# Altium PCB REO_ECG.PcbDoc (part 1 of 2)
Units mm, origin at the board's own origin, x right, y up, seen from the top; angles counter-clockwise.
Board outline 105 x 125 mm, 2 copper layers (Top Layer, Bottom Layer); 206 components, 124 nets, 654 pads, 46 vias.
Unrouted connection lines stored in the file: 133.
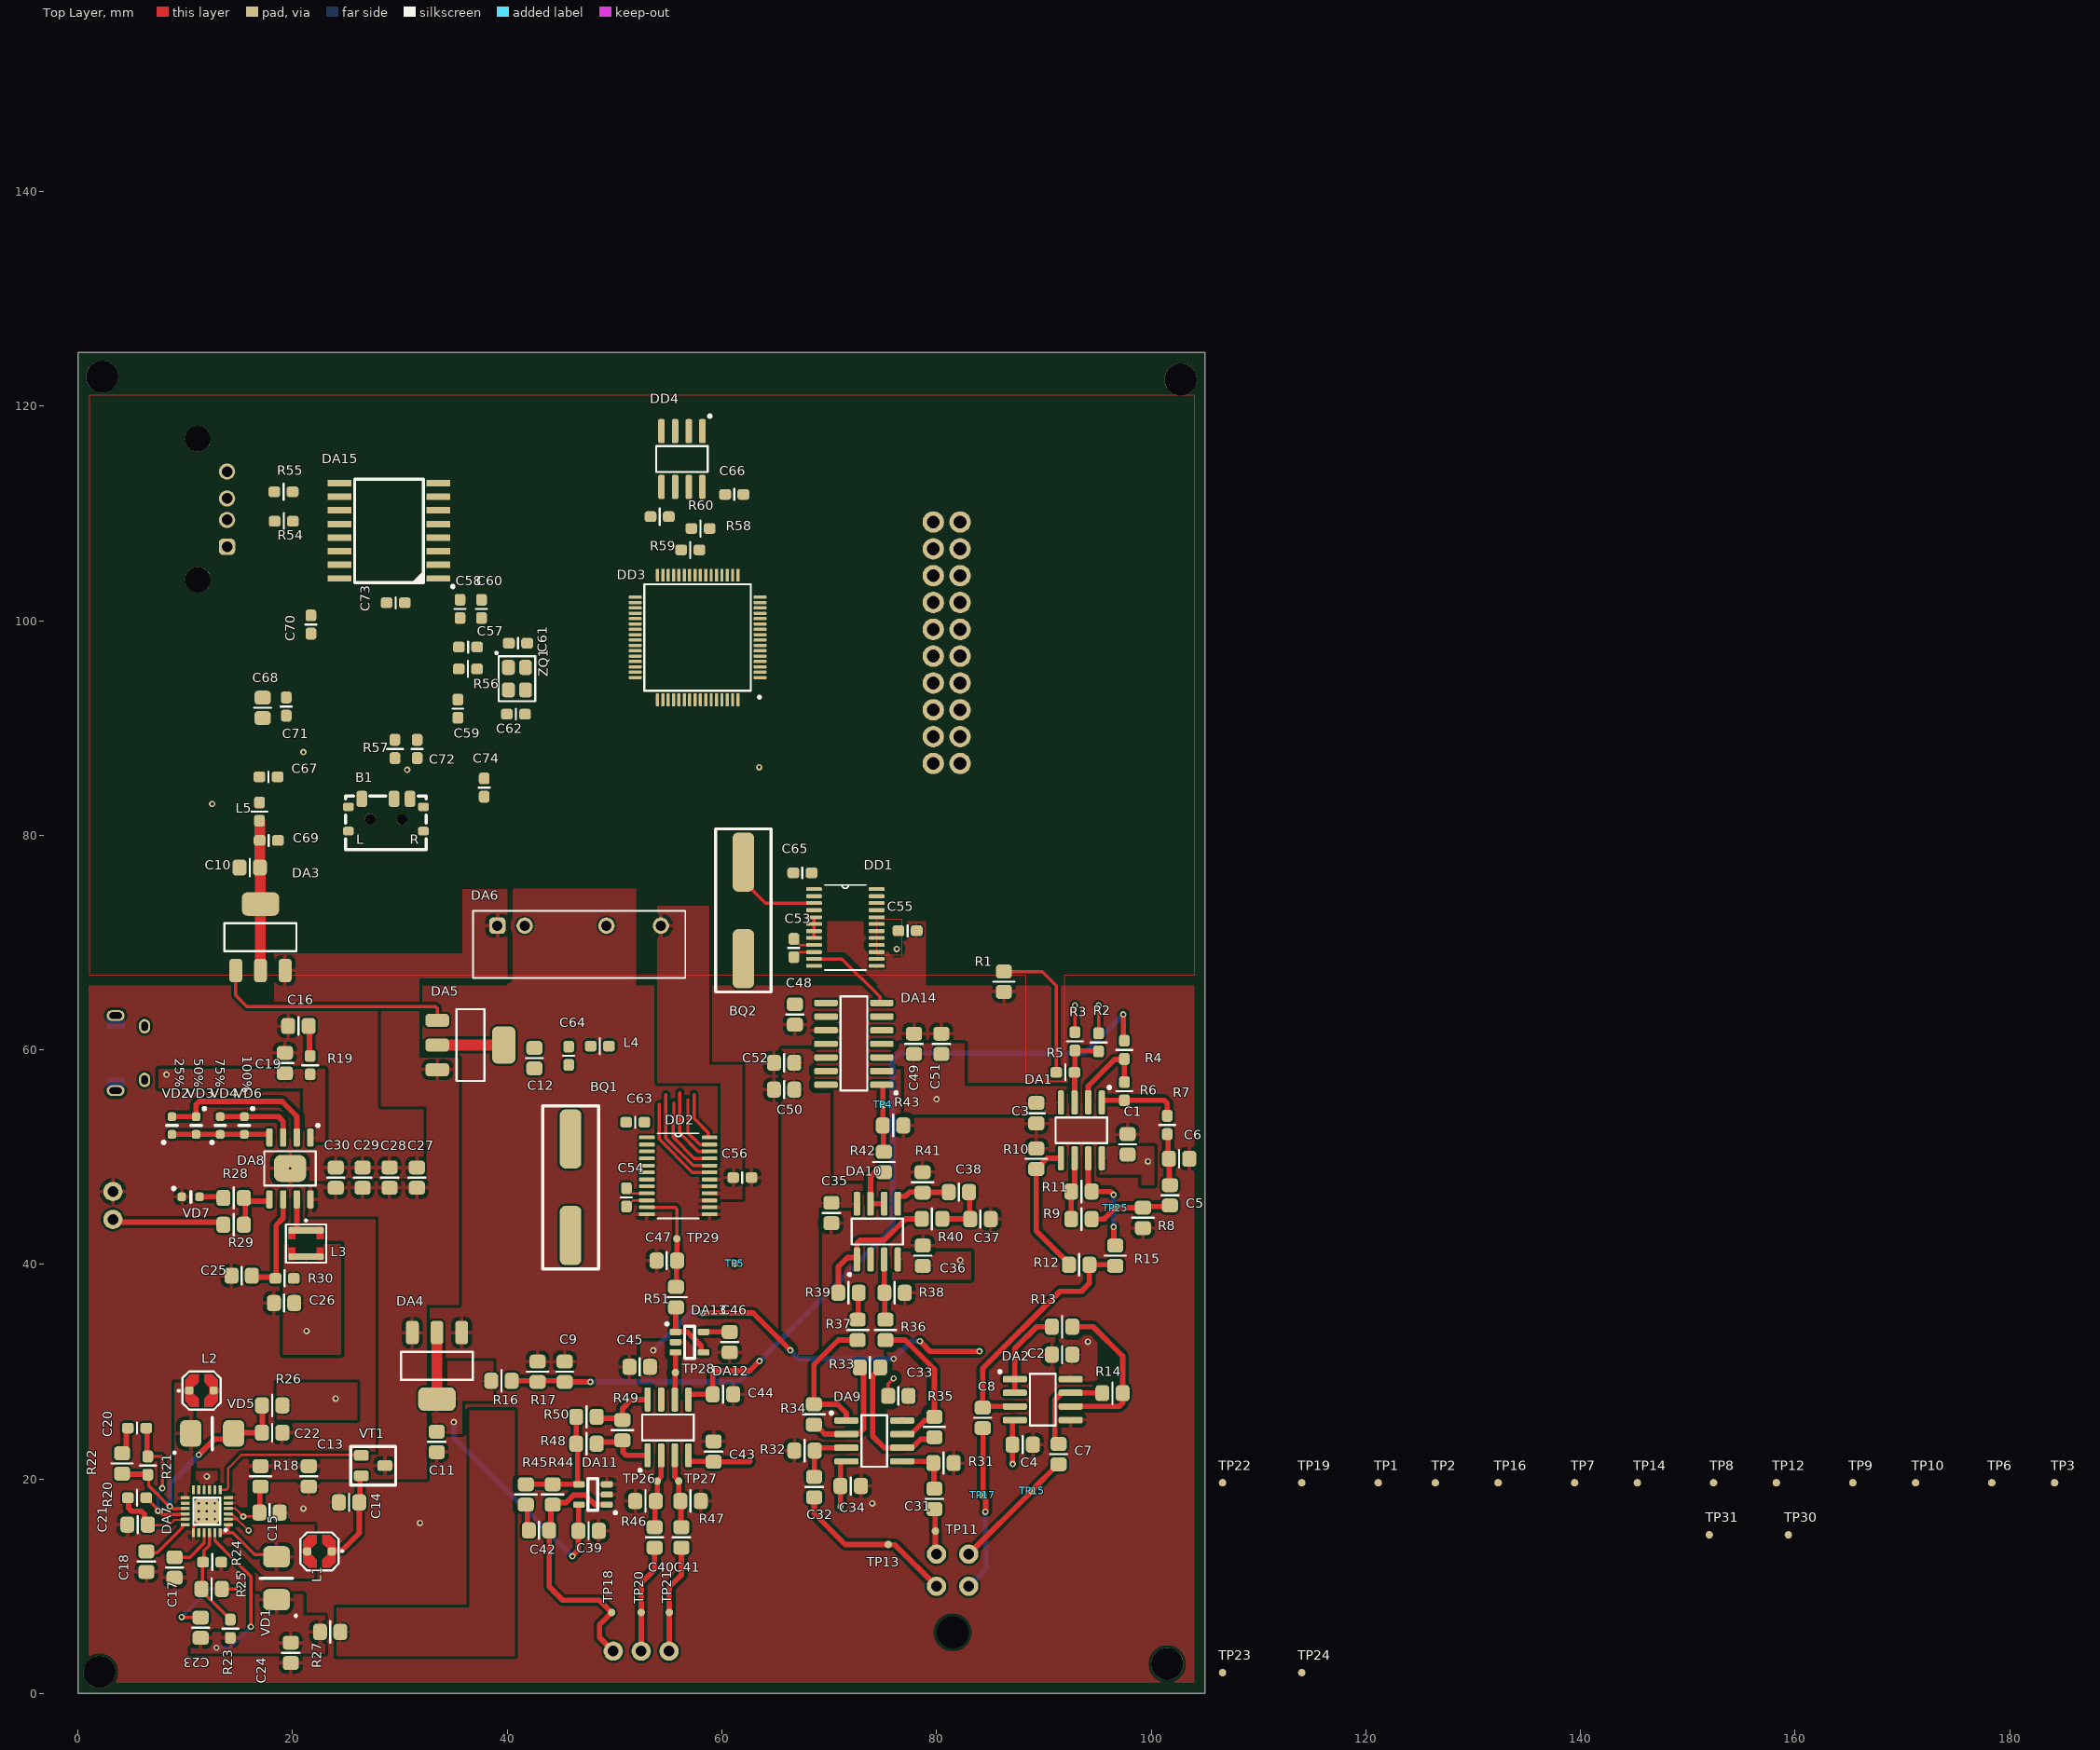
[diagram p0: Top Layer view]
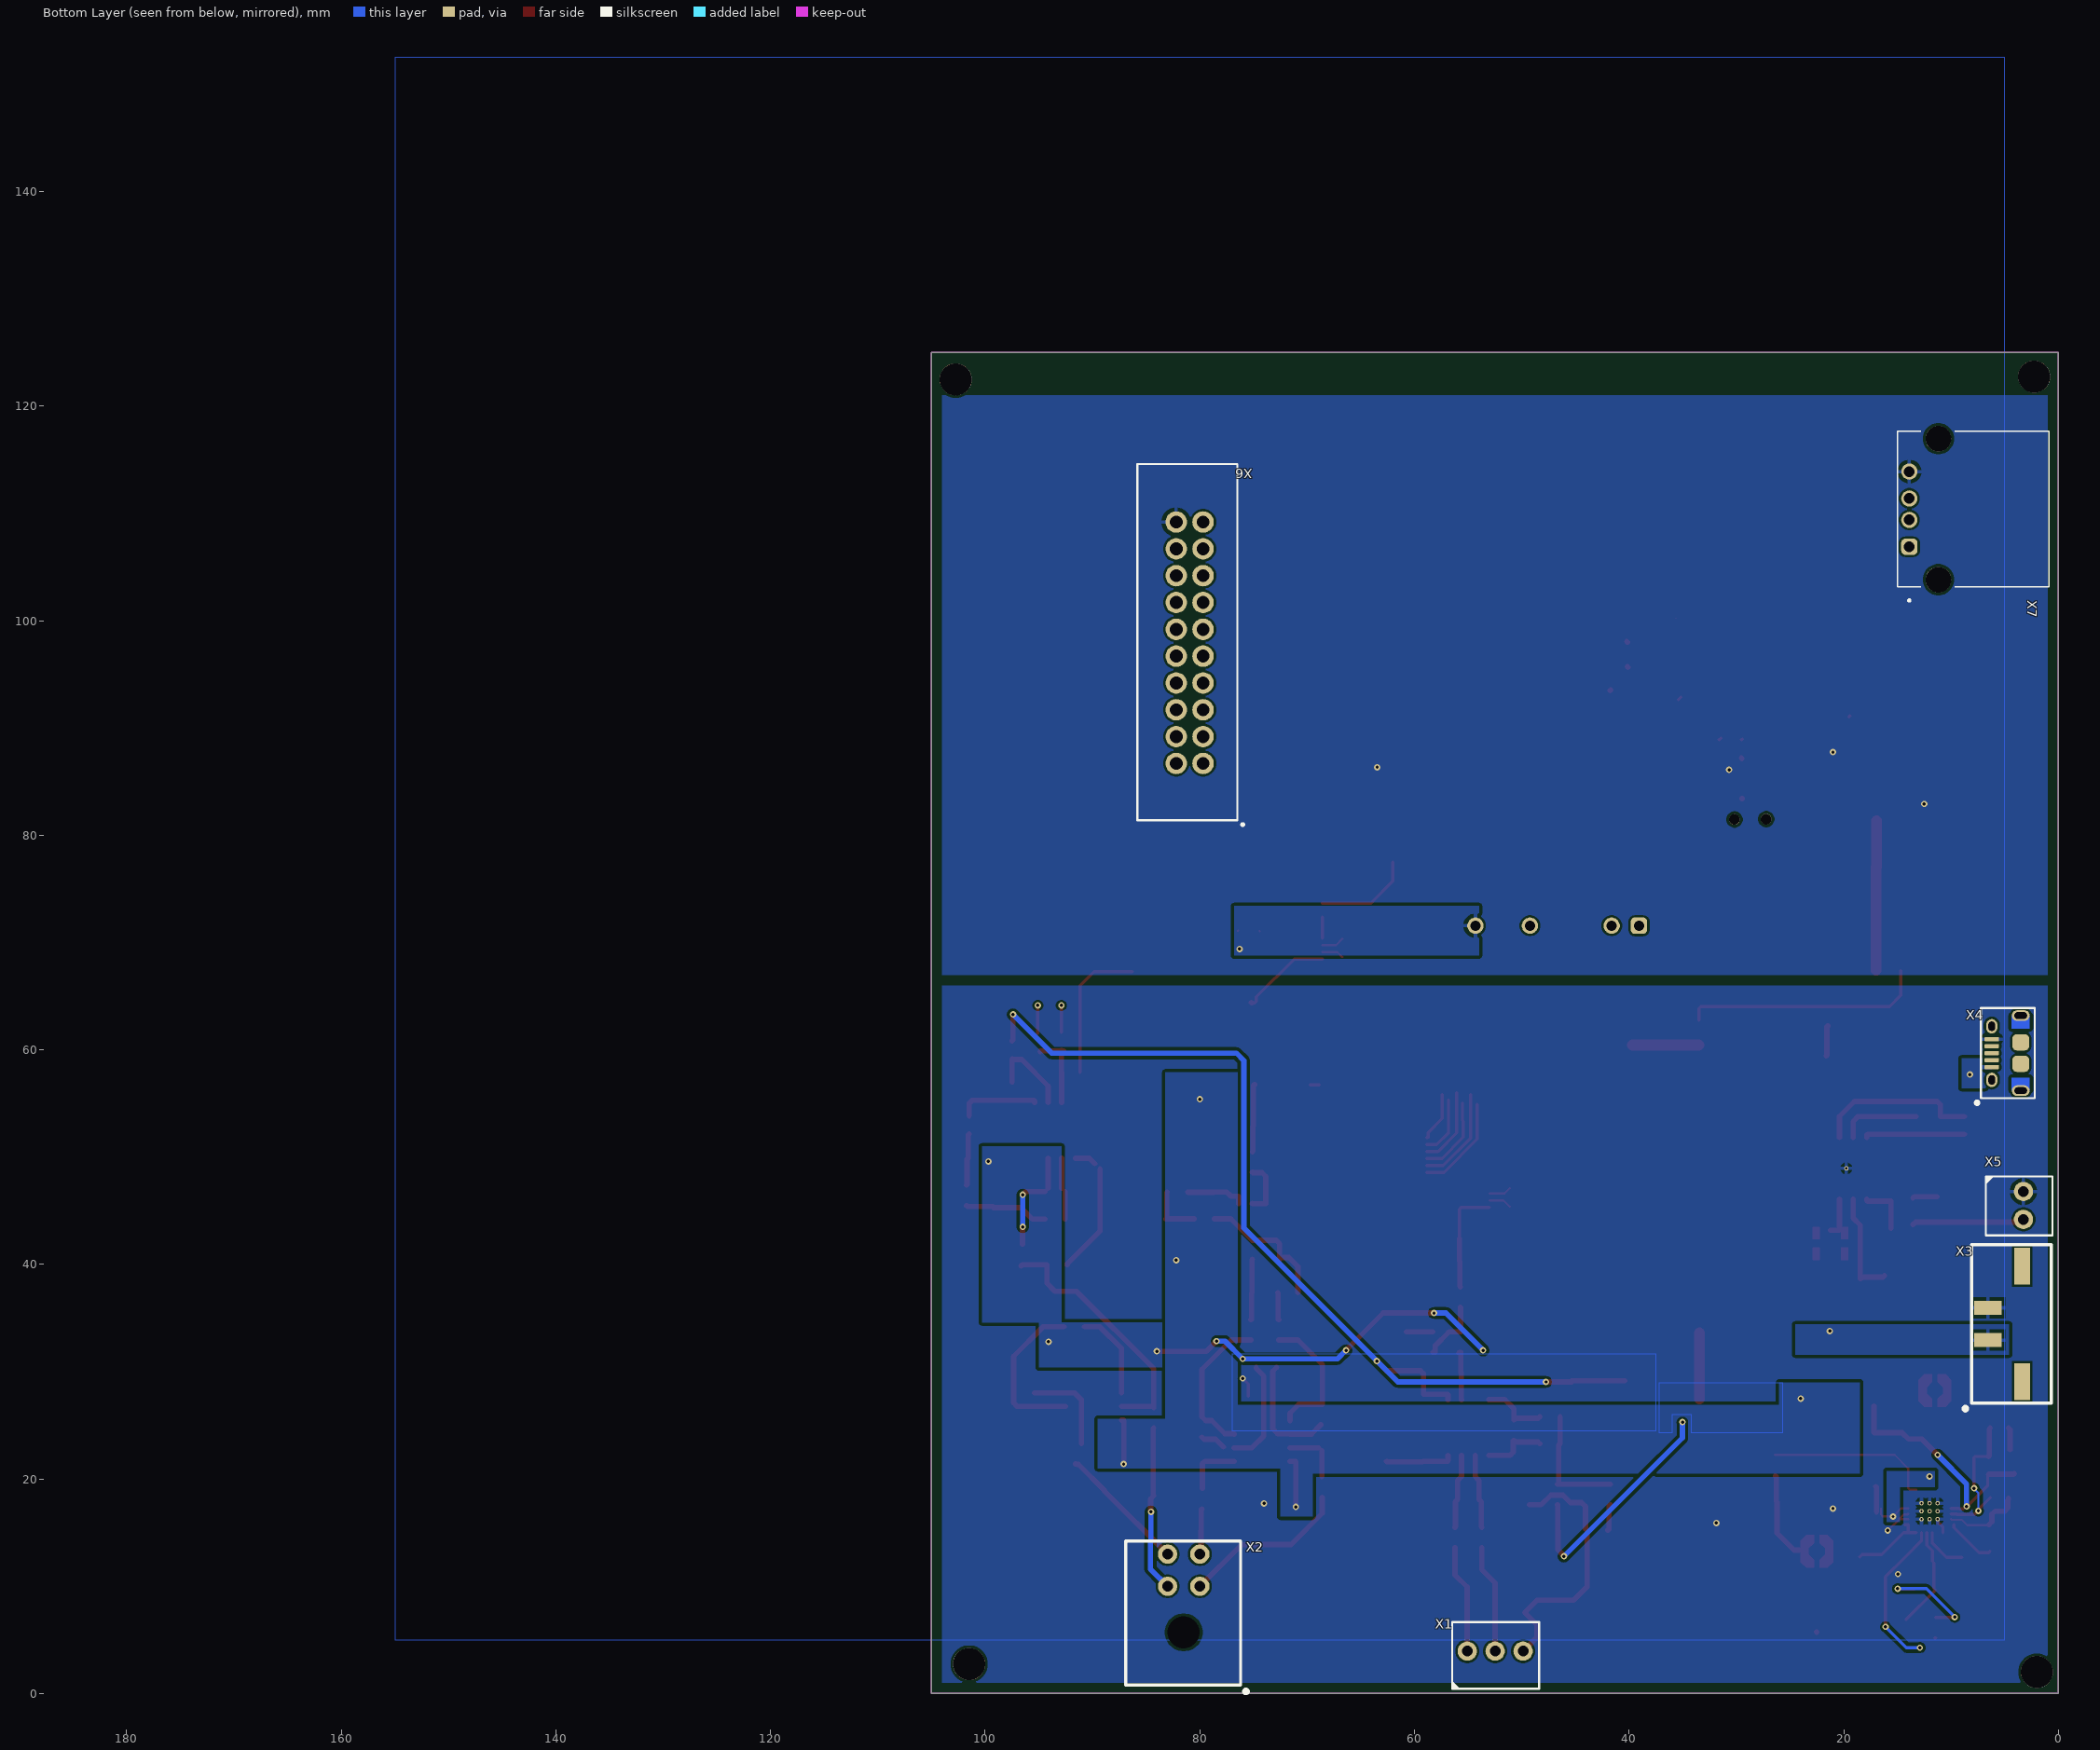
[diagram p1: Bottom Layer view, seen from below]
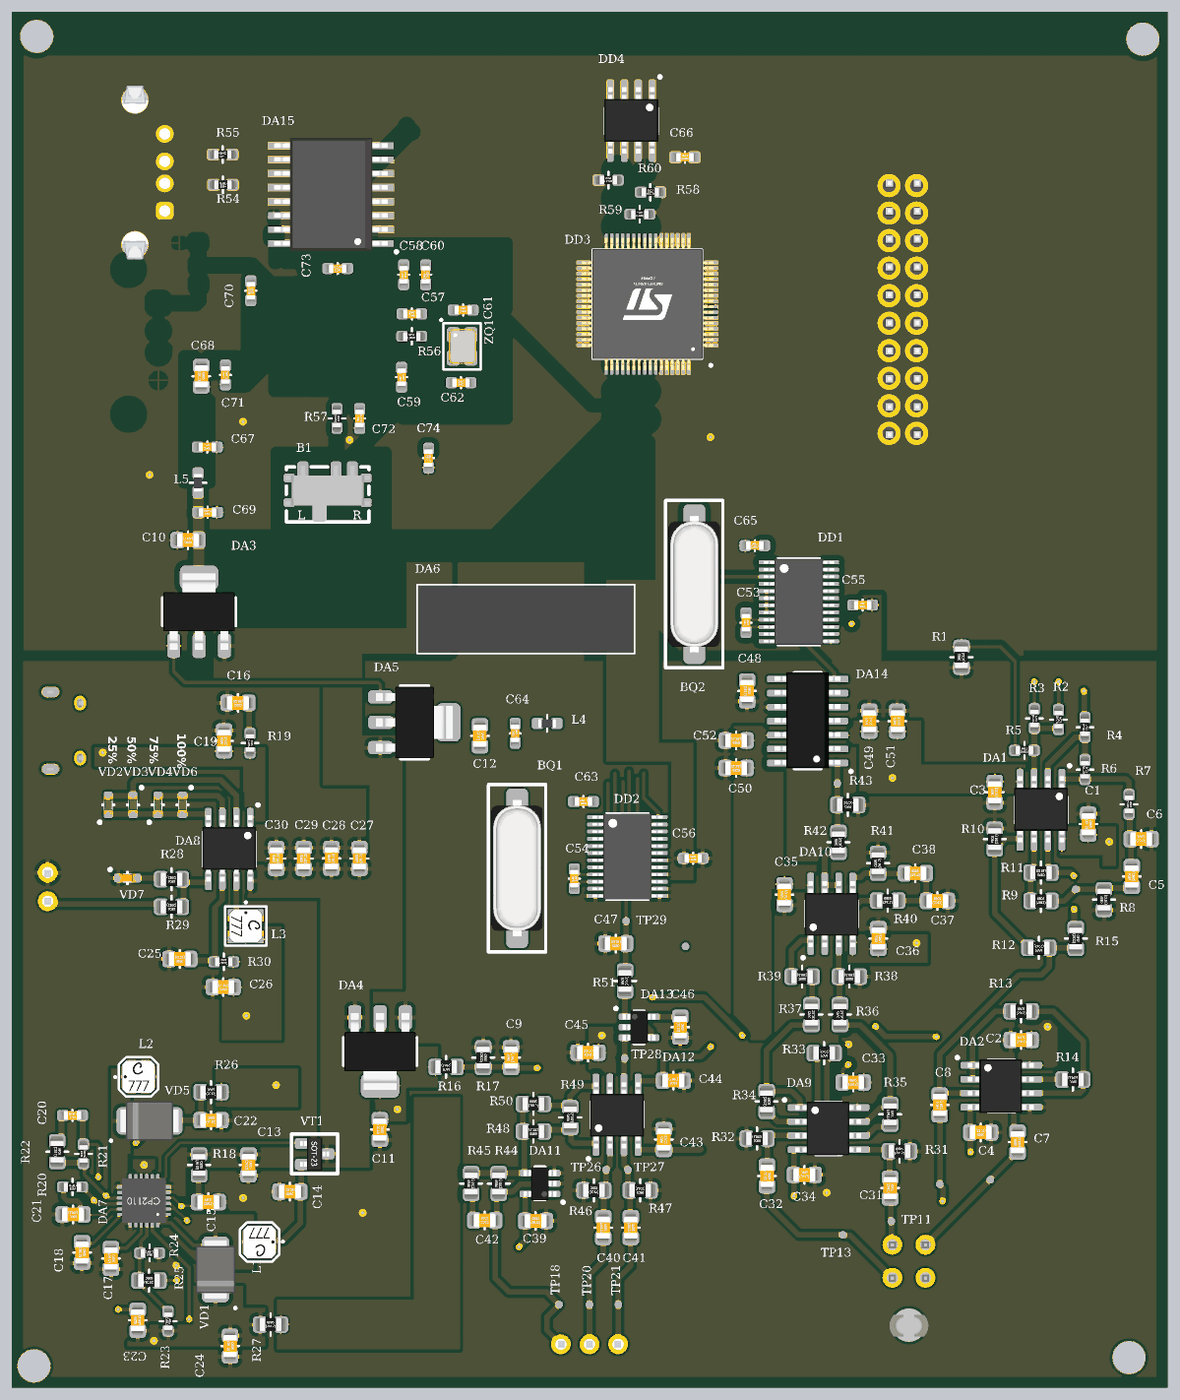
[diagram p3: 3D render of the assembled board from above, using the file's embedded part models]
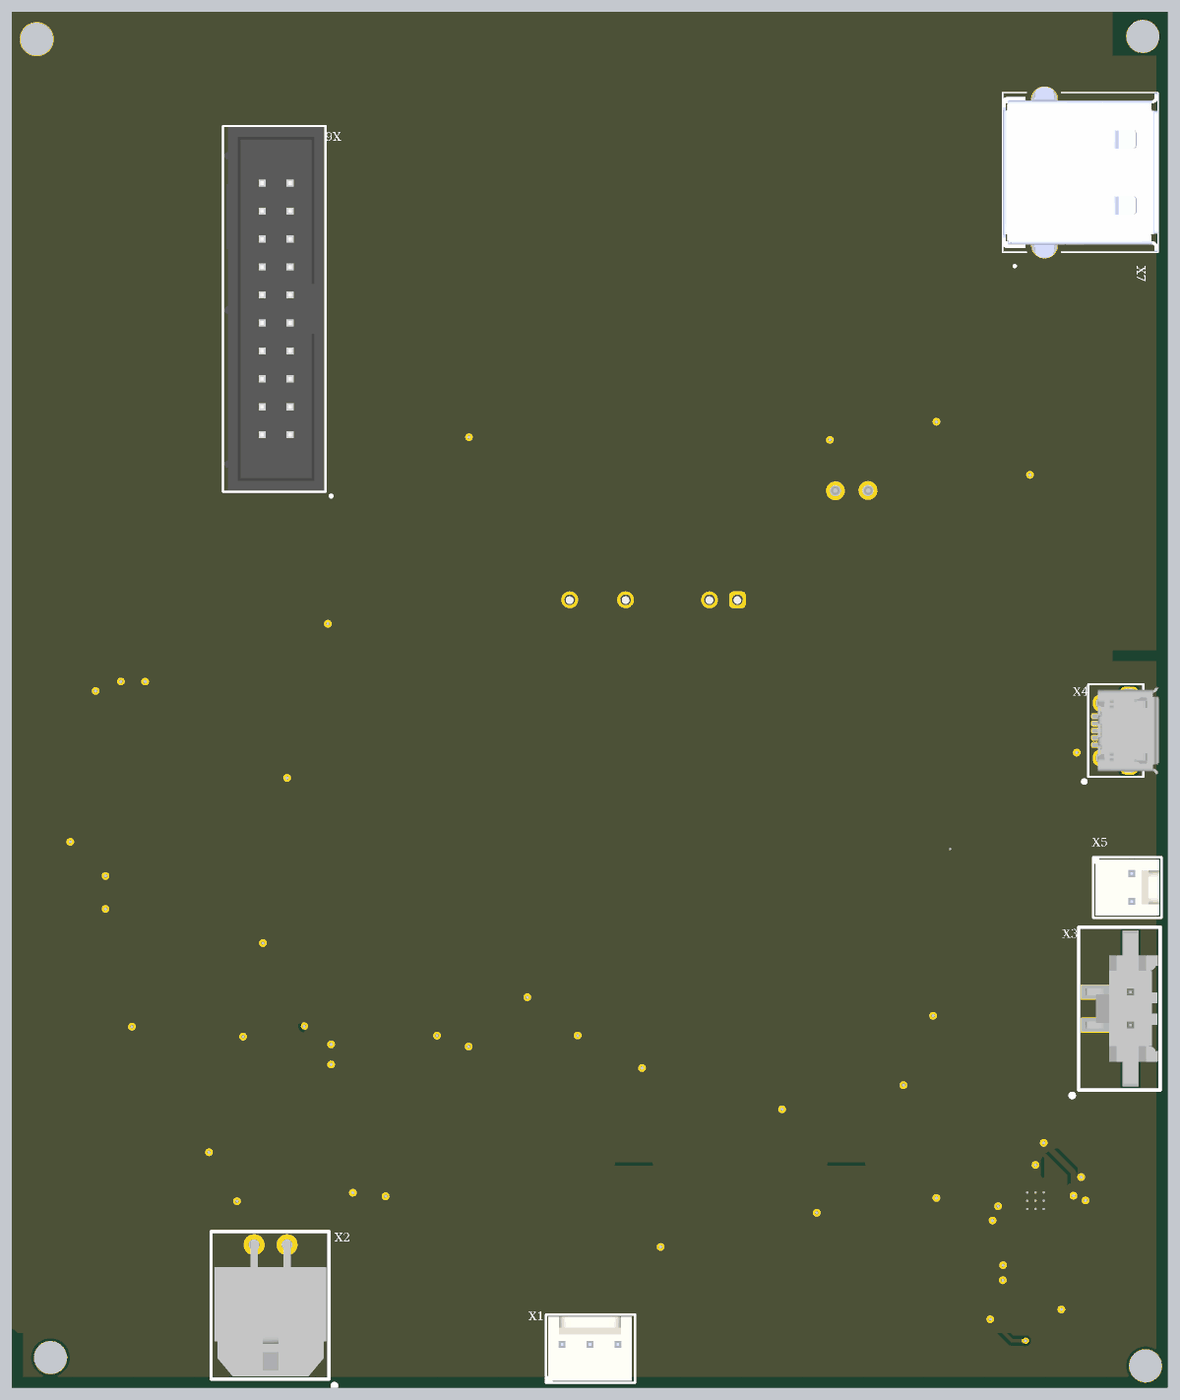
[diagram p4: 3D render of the assembled board from below, using the file's embedded part models]

## Layer stack, top to bottom
Top Solder: solder mask 0.0102, Solder Resist, Dk 3.5
Top Layer: signal copper 0.0356
Dielectric 1: dielectric 0.32, FR-4, Dk 4.8
Bottom Layer: signal copper 0.0356
Bottom Solder: solder mask 0.0102, Solder Resist, Dk 3.5

## Board outline
0,0 105,0 105,125 0,125

## Design rules (kind name [scope] priority, off if disabled: settings)
AcuteAngle [All] p1: minimum=3.50000000000000E+0001 checktracksonly=FALSE
BoardOutlineClearance "BoardOutlineClearance 1" [All] p1: gap=0.25 ignorepadtopadclearanceinfootprint=FALSE except(0: Arc-SplitContinuation Track-SplitContinuation SMDPad-SplitContinuation THPad-SplitContinuation Via-SplitContinuation Fill-SplitContinuation Poly-SplitContinuation Region-SplitContinuation Text-SplitContinuation) // Milling
BoardOutlineClearance "BoardOutlineClearance 2" [All] p2: gap=0.4 ignorepadtopadclearanceinfootprint=FALSE except(0: Arc-SplitContinuation Track-SplitContinuation SMDPad-SplitContinuation THPad-SplitContinuation Via-SplitContinuation Fill-SplitContinuation Poly-SplitContinuation Region-SplitContinuation Text-SplitContinuation) // V-Cut
Clearance "Clearance 3 Oz" [InNet('No Net') vs InNet('No Net')] p1 off: gap=0.35 ignorepadtopadclearanceinfootprint=FALSE except(0.25: Arc-Hole Track-Hole SMDPad-Hole THPad-Hole Via-Hole Fill-Hole Poly-Hole Region-Hole Text-Hole)
Clearance "Clearance 2 Oz" [InNet('No Net') vs InNet('No Net')] p2 off: gap=0.3 ignorepadtopadclearanceinfootprint=FALSE except(0.25: Arc-Hole Track-Hole SMDPad-Hole THPad-Hole Via-Hole Fill-Hole Poly-Hole Region-Hole Text-Hole)
Clearance "Clearance-1 1 Oz" [All] p3: gap=0.2 ignorepadtopadclearanceinfootprint=FALSE except(0.25: Arc-Hole Track-Hole SMDPad-Hole THPad-Hole Via-Hole Fill-Hole Poly-Hole Region-Hole Text-Hole; 0.3: Arc-Fill Arc-Poly Arc-Region Track-Fill Track-Poly Track-Region Fill-Fill Fill-Poly Fill-Region Poly-Poly Poly-Region Region-Region) // Standart
Clearance "Clearance-2 1 Oz" [InNet('No Net') vs InNet('No Net')] p4: gap=0.15 ignorepadtopadclearanceinfootprint=FALSE except(0.2: Arc-Fill Arc-Poly Track-Fill Track-Poly SMDPad-Fill SMDPad-Poly THPad-Fill THPad-Poly Via-Fill Via-Poly Fill-Fill Fill-Poly Poly-Poly; 0.25: Arc-Hole Track-Hole SMDPad-Hole THPad-Hole Via-Hole Fill-Hole Poly-Hole Region-Hole Text-Hole) // Advance
Clearance "Clearance-1 1/2 Oz" [InNet('No Net') vs InNet('No Net')] p5: gap=0.125 ignorepadtopadclearanceinfootprint=FALSE except(0.2: Arc-Fill Arc-Poly Track-Fill Track-Poly SMDPad-SMDPad SMDPad-Fill SMDPad-Poly THPad-Fill THPad-Poly Via-Fill Via-Poly Fill-Fill Fill-Poly Poly-Poly Poly-Region Poly-Text; 0.25: Arc-Hole Track-Hole SMDPad-Hole THPad-Hole Via-Hole Fill-Hole Poly-Hole Region-Hole Text-Hole) // Standart
Clearance "Clearance-2 1/2 Oz" [InNet('No Net') vs InNet('No Net')] p6: gap=0.1 ignorepadtopadclearanceinfootprint=FALSE except(0.15: Arc-Fill Arc-Poly Track-Fill Track-Poly SMDPad-SMDPad SMDPad-Fill SMDPad-Poly THPad-Fill THPad-Poly Via-Fill Via-Poly Fill-Fill Fill-Poly Poly-Poly Poly-Region Poly-Text; 0.25: Arc-Hole Track-Hole SMDPad-Hole THPad-Hole Via-Hole Fill-Hole Poly-Hole Region-Hole Text-Hole) // Advance
DiffPairsRouting "DiffPairsRouting 1 Oz" [All] p1: maxlimit=0.254 minlimit=0.2 mostfreqgap=0.254 toplayer_minwidth=0.2 toplayer_maxwidth=0.381 toplayer_prefwidth=0.381 bottomlayer_minwidth=0.2 bottomlayer_maxwidth=0.381 bottomlayer_prefwidth=0.381 maxuncoupledlength=12.7
DiffPairsRouting "DiffPairsRouting 1/2 Oz" [All] p2: maxlimit=0.254 minlimit=0.1 mostfreqgap=0.254 toplayer_minwidth=0.1 toplayer_maxwidth=0.381 toplayer_prefwidth=0.381 bottomlayer_minwidth=0.1 bottomlayer_maxwidth=0.381 bottomlayer_prefwidth=0.381 maxuncoupledlength=12.7
HoleSize "Minimum HoleSize" [IsPad] p1: absolutevalues=TRUE maxlimit=5.9 minlimit=0.6 maxpercent=80.000 minpercent=20.000
HoleSize "Minimum HoleSize VIA 1" [IsVia] p2: absolutevalues=TRUE maxlimit=5.9 minlimit=0.3 maxpercent=80.000 minpercent=20.000 // Standart
HoleSize "Minimum HoleSize VIA 2" [IsVia] p3: absolutevalues=TRUE maxlimit=5.9 minlimit=0.2 maxpercent=80.000 minpercent=20.000 // Advance
HoleToHoleClearance Hole2HoleClearance [All] p1: gap=0.25 allowstackedmicrovias=FALSE
MinimumAnnularRing "Minimum AR VIA Standart" [IsVia] p1: minimumring=0.15
MinimumAnnularRing "Minimum AR PAD Standart" [IsPAD] p2: minimumring=0.2
MinimumAnnularRing "Minimum AR VIA Advance" [IsVia] p3: minimumring=0.1
MinimumAnnularRing "Minimum AR PAD Advance" [IsPAD] p4: minimumring=0.15
MinimumSolderMaskSliver "SolderMask Bridge Standart" [All] p1: minsoldermaskwidth=0.1 // All Masks
MinimumSolderMaskSliver "SolderMask Bridge Advance" [All] p2: minsoldermaskwidth=0.1 // Mask LDI
PlaneClearance "PlaneClearance 3 Oz" [InNet('No Net')] p1: clearance=0.35
PlaneClearance "PlaneClearance 2 Oz" [InNet('No Net')] p2: clearance=0.3
PlaneClearance "PlaneClearance 1 Oz" [All] p3: clearance=0.2
PlaneClearance "PlaneClearance-1 1/2 Oz" [InNet('No Net')] p4: clearance=0.2 // Standart
PlaneClearance "PlaneClearance-2 1/2 Oz" [InNet('No Net')] p5: clearance=0.15 // Advance
PlaneConnect "TermalConnect 3 Oz" [All] p1: planeconnectstyle=Relief reliefexpansion=0.2 reliefentries=4 reliefconductorwidth=0.35 reliefairgap=0.35 // Standart
PlaneConnect "TermalConnect 2 Oz" [All] p2: planeconnectstyle=Relief reliefexpansion=0.2 reliefentries=4 reliefconductorwidth=0.3 reliefairgap=0.3 // Standart
PlaneConnect "TermalConnect-1 1 Oz" [All] p3: planeconnectstyle=Relief reliefexpansion=0.2 reliefentries=4 reliefconductorwidth=0.2 reliefairgap=0.2 // Standart
PlaneConnect "TermalConnect-2 1 Oz" [All] p4: pad.planeconnectstyle=Relief pad.reliefexpansion=0.15 pad.reliefentries=4 pad.reliefconductorwidth=0.2 pad.reliefairgap=0.2 via.planeconnectstyle=Direct via.reliefexpansion=0.15 via.reliefentries=4 via.reliefconductorwidth=0.15 via.reliefairgap=0.15 // Advance
PlaneConnect "TermalConnect-1 1/2 Oz" [All] p5: planeconnectstyle=Relief reliefexpansion=0.2 reliefentries=4 reliefconductorwidth=0.2 reliefairgap=0.2 // Standart
PlaneConnect "TermalConnect-2 1/2 Oz" [All] p6: pad.planeconnectstyle=Relief pad.reliefexpansion=0.15 pad.reliefentries=4 pad.reliefconductorwidth=0.15 pad.reliefairgap=0.15 via.planeconnectstyle=Direct via.reliefexpansion=0.15 via.reliefentries=4 via.reliefconductorwidth=0.15 via.reliefairgap=0.15 // Advance
PolygonConnect "PolygonConnect 3 Oz" [All] p1: thpad.connectstyle=Relief thpad.reliefconductorwidth=0.35 thpad.reliefentries=4 thpad.polygonreliefangle="90 Angle" thpad.airgapwidth=0.35 smdpad.connectstyle=Relief smdpad.reliefconductorwidth=0.35 smdpad.reliefentries=4 smdpad.polygonreliefangle="90 Angle" smdpad.airgapwidth=0.35 via.connectstyle=Direct via.reliefconductorwidth=0.254 via.reliefentries=4 via.polygonreliefangle="90 Angle" via.airgapwidth=0.254
PolygonConnect "PolygonConnect 2 Oz" [InNet('No Net') vs InNet('No Net')] p2: thpad.connectstyle=Relief thpad.reliefconductorwidth=0.3 thpad.reliefentries=4 thpad.polygonreliefangle="90 Angle" thpad.airgapwidth=0.3 smdpad.connectstyle=Relief smdpad.reliefconductorwidth=0.3 smdpad.reliefentries=4 smdpad.polygonreliefangle="90 Angle" smdpad.airgapwidth=0.3 via.connectstyle=Direct via.reliefconductorwidth=0.254 via.reliefentries=4 via.polygonreliefangle="90 Angle" via.airgapwidth=0.254
PolygonConnect "PolygonConnect-1 1 Oz" [InNet('No Net') vs InNet('No Net')] p3: thpad.connectstyle=Relief thpad.reliefconductorwidth=0.2 thpad.reliefentries=4 thpad.polygonreliefangle="90 Angle" thpad.airgapwidth=0.2 smdpad.connectstyle=Relief smdpad.reliefconductorwidth=0.2 smdpad.reliefentries=4 smdpad.polygonreliefangle="90 Angle" smdpad.airgapwidth=0.2 via.connectstyle=Direct via.reliefconductorwidth=0.254 via.reliefentries=4 via.polygonreliefangle="90 Angle" via.airgapwidth=0.254 // Standart
PolygonConnect "PolygonConnect-2 1 Oz" [InNet('No Net') vs InNet('No Net')] p4: thpad.connectstyle=Relief thpad.reliefconductorwidth=0.15 thpad.reliefentries=4 thpad.polygonreliefangle="90 Angle" thpad.airgapwidth=0.15 smdpad.connectstyle=Relief smdpad.reliefconductorwidth=0.15 smdpad.reliefentries=4 smdpad.polygonreliefangle="90 Angle" smdpad.airgapwidth=0.15 via.connectstyle=Direct via.reliefconductorwidth=0.254 via.reliefentries=4 via.polygonreliefangle="90 Angle" via.airgapwidth=0.254 // Advance
PolygonConnect "PolygonConnect-1 1/2 Oz" [InNet('No Net') vs InNet('No Net')] p5: thpad.connectstyle=Relief thpad.reliefconductorwidth=0.15 thpad.reliefentries=4 thpad.polygonreliefangle="90 Angle" thpad.airgapwidth=0.2 smdpad.connectstyle=Relief smdpad.reliefconductorwidth=0.2 smdpad.reliefentries=4 smdpad.polygonreliefangle="90 Angle" smdpad.airgapwidth=0.2 via.connectstyle=Direct via.reliefconductorwidth=0.254 via.reliefentries=4 via.polygonreliefangle="90 Angle" via.airgapwidth=0.254 // Standart
PolygonConnect "PolygonConnect-2 1/2 Oz" [InNet('No Net') vs InNet('No Net')] p6: thpad.connectstyle=Relief thpad.reliefconductorwidth=0.125 thpad.reliefentries=4 thpad.polygonreliefangle="90 Angle" thpad.airgapwidth=0.15 smdpad.connectstyle=Relief smdpad.reliefconductorwidth=0.125 smdpad.reliefentries=4 smdpad.polygonreliefangle="90 Angle" smdpad.airgapwidth=0.15 via.connectstyle=Direct via.reliefconductorwidth=0.254 via.reliefentries=4 via.polygonreliefangle="90 Angle" via.airgapwidth=0.254 // Advance
RoutingCorners [All] p1 off: cornerstyle=45-Degree minsetback=2.54 maxsetback=2.54
RoutingVias [All] p1: holewidth=0.3 width=0.6 viastyle="Through Hole" minholewidth=0.2 minwidth=0.4 maxholewidth=5.9 maxwidth=6.4
SilkToSilkClearance Silk2SilkClearance [All] p1 off: silktosilkclearance=0.15
SilkToSolderMaskClearance Silk2SolderMaskClearance [IsPad] p1 off: minsilkscreentomaskgap=0.15 clearancetoexposedcopper=TRUE
SolderMaskExpansion SolderMaskExpansion-1 [All] p1: expansion=0.05 istentingtop=FALSE // Standart
SolderMaskExpansion "SolderMaskExpansion LDI" [All] p2: expansion=0.025 istentingtop=FALSE // Advance
UnRoutedNet [All] p1: checkbadconnections=TRUE
Width "Width 3 Oz" [All] p1 off: maxlimit=10 minlimit=0.3 preferedwidth=0.4 minimp=50.000000 maximp=50.000000 favimp=50.000000 checkconnectedcopper=TRUE
Width "Width 2 Oz" [All] p2 off: maxlimit=10 minlimit=0.3 preferedwidth=0.35 minimp=50.000000 maximp=50.000000 favimp=50.000000 checkconnectedcopper=TRUE
Width "Width 1 Oz" [All] p3: maxlimit=10 minlimit=0.15 preferedwidth=0.2 checkconnectedcopper=TRUE
Width "Width 1/2 Oz" [All] p4: maxlimit=10 minlimit=0.1 preferedwidth=0.125 checkconnectedcopper=TRUE
20 further rules are at their usual default settings.

## Classes and differential pairs
component class REO_ECG: R1 TP1 TP2 TP3 TP4 TP5 TP6 TP7 TP8 TP9 TP10 TP11 TP12 TP13 TP14 TP15 TP16 TP17 TP18 TP19 TP20 TP21 TP22 X1 X2 X3 X4
component class POWER: C9 C10 C11 C12 C13 C14 C15 C16 C17 C18 C19 C20 C21 C22 C23 C24 C25 C26 C27 C28 C29 C30 DA3 DA4 DA5 DA6 DA7 DA8 L1 L2 L3 R16 R17 R18 R19 R20 R21 R22 R23 R24 R25 R26 R27 R28 R29 R30 VD1 VD2 VD3 VD4 VD5 VD6 VD7 VT1 X5
component class Measurement: C31 C32 C33 C34 C35 C36 C37 C38 DA9 DA10 R31 R32 R33 R34 R35 R36 R37 R38 R39 R40 R41 R42 R43
component class INTERFACES: B1 BQ1 BQ2 C48 C49 C50 C51 C52 C53 C54 C55 C56 C57 C58 C59 C60 C61 C62 C63 C64 C65 C66 C67 C68 C69 C70 C71 C72 C73 C74 DA14 DA15 DD1 DD2 DD3 DD4 L4 L5 R54 R55 R56 R57 R58 R59 R60 TP30 TP31 X6 X7 ZQ1
component class Generator: C1 C2 C3 C4 C5 C6 C7 C8 DA1 DA2 R2 R3 R4 R5 R6 R7 R8 R9 R10 R11 R12 R13 R14 R15 TP23 TP24 TP25
component class ECG: C39 C40 C41 C42 C43 C44 C45 C46 C47 DA11 DA12 DA13 R44 R45 R46 R47 R48 R49 R50 R51 TP26 TP27 TP28 TP29
differential pair 4D: +4D_P -4D_N
differential pair 3D: +3D_P -3D_N
differential pair 2D: +2D_P -2D_N
differential pair 1D: +1D_P -1D_N

## Components (designator, comment, footprint, x,y, rotation, side; value= is the part's Value field where it differs from the comment)
B1 "SPDT" "Slide Switch 3 pin" 28.689,80.149 r0 top
BQ1 "HC-49SM" "CRYSTAL: HC-49SM" 45.9,47.2 r90 top
BQ2 "HC-49SM" "CRYSTAL: HC-49SM" 62,73 r90 top
C1 "0.1u 50V 0805 ±10%" "CAP: SMD 0805 MD IPC 782" 97.8,51.2 r270 top
C2 "0.1u 50V 0805 ±10%" "CAP: SMD 0805 MD IPC 782" 91.7,31.6 r0 top
C3 "0.1u 50V 0805 ±10%" "CAP: SMD 0805 MD IPC 782" 89.3,54.1 r90 top
C4 "0.1u 50V 0805 ±10%" "CAP: SMD 0805 MD IPC 782" 88.027,23.2 r180 top
C5 "0.1u 50V 0805 ±10%" "CAP: SMD 0805 MD IPC 782" 101.75,46.446 r90 top
C6 "6.8n 50V 0805 ±5%" "CAP: SMD 0805 MD IPC 782" 102.6,49.85 r0 top
C7 "22u 35V 0805 ±20%" "CAP: SMD 0805 MD IPC 782" 91.373,22.316 r90 top
C8 "22u 35V 0805 ±20%" "CAP: SMD 0805 MD IPC 782" 84.3,25.7 r90 top
C9 "0.1u 50V 0805 ±10%" "CAP: SMD 0805 MD IPC 782" 45.35,30 r90 top
C10 "0.1u 50V 0805 ±10%" "CAP: SMD 0805 MD IPC 782" 16,77 r180 top
C11 "0.1u 50V 0805 ±10%" "CAP: SMD 0805 MD IPC 782" 33.425,23.459 r270 top
C12 "0.1u 50V 0805 ±10%" "CAP: SMD 0805 MD IPC 782" 42.525,59.225 r270 top
C13 "4.7u 25V 0805 ±10%" "CAP: SMD 0805 MD IPC 782" 21.5,20.25 r270 top
C14 "4.7u 25V 0805 ±10%" "CAP: SMD 0805 MD IPC 782" 25.257,17.822 r180 top
C15 "0.1u 50V 0805 ±10%" "CAP: SMD 0805 MD IPC 782" 17.85,16.879 r0 top
C16 "10u 50V 0805 ±10%" "CAP: SMD 0805 MD IPC 782" 20.534,62.221 r180 top
C17 "22u 35V 0805" "CAP: SMD 0805 MD IPC 782" 9,11.75 r270 top
C18 "22u 35V 0805" "CAP: SMD 0805 MD IPC 782" 6.369,12.296 r270 top
C19 "10u 50V 0805 ±10%" "CAP: SMD 0805 MD IPC 782" 19.275,58.771 r90 top
C20 "12p 50V 0603 ±5%" "CAP: SMD 0603 MD IPC 782" 5.5,24.75 r180 top
C21 "0.22u 50V 0805 ±10%" "CAP: SMD 0805 MD IPC 782" 5.55,15.75 r180 top
C22 "22u 35V 0805" "CAP: SMD 0805 MD IPC 782" 18.09,24.311 r0 top
C23 "6.8p 16V 0805 ±5%" "CAP: SMD 0805 MD IPC 782" 11.425,6.14 r90 top
C24 "22u 35V 0805 ±20%" "CAP: SMD 0805 MD IPC 782" 19.825,3.8 r270 top
C25 "22u 35V 0805 ±20%" "CAP: SMD 0805 MD IPC 782" 15.25,38.95 r180 top
C26 "22u 35V 0805 ±20%" "CAP: SMD 0805 MD IPC 782" 19.2,36.4 r180 top
C27 "22u 35V 0805 ±20%" "CAP: SMD 0805 MD IPC 782" 31.575,48.091 r90 top
C28 "22u 35V 0805 ±20%" "CAP: SMD 0805 MD IPC 782" 29.028,48.097 r90 top
C29 "22u 35V 0805 ±20%" "CAP: SMD 0805 MD IPC 782" 26.514,48.091 r90 top
C30 "22u 35V 0805 ±20%" "CAP: SMD 0805 MD IPC 782" 24.014,48.091 r90 top
C31 "6.8n 50V 0805 ±5%" "CAP: SMD 0805 MD IPC 782" 79.8,18.15 r270 top
C32 "6.8n 50V 0805 ±5%" "CAP: SMD 0805 MD IPC 782" 68.6,19.25 r270 top
C33 "0.1u 50V 0805 ±10%" "CAP: SMD 0805 MD IPC 782" 76.441,27.744 r0 top
C34 "0.1u 50V 0805 ±10%" "CAP: SMD 0805 MD IPC 782" 72,19.35 r0 top
C35 "0.1u 50V 0805 ±10%" "CAP: SMD 0805 MD IPC 782" 70.2,44.8 r90 top
C36 "0.1u 50V 0805 ±10%" "CAP: SMD 0805 MD IPC 782" 78.724,40.814 r90 top
C37 "6.8n 50V 0805 ±5%" "CAP: SMD 0805 MD IPC 782" 84.089,44.228 r0 top
C38 "6.8n 50V 0805 ±5%" "CAP: SMD 0805 MD IPC 782" 82.084,46.746 r0 top
C39 "0.1u 50V 0805 ±10%" "CAP: SMD 0805 MD IPC 782" 47.578,15.164 r0 top
C40 "0.68u 50V 0805 ±10%" "CAP: SMD 0805 MD IPC 782" 53.728,14.559 r270 top
C41 "0.68u 50V 0805 ±10%" "CAP: SMD 0805 MD IPC 782" 56.228,14.559 r270 top
C42 "6.8n 50V 0805 ±5%" "CAP: SMD 0805 MD IPC 782" 42.956,15.211 r0 top
C43 "0.1u 50V 0805 ±10%" "CAP: SMD 0805 MD IPC 782" 59.228,22.559 r90 top
C44 "0.1u 50V 0805 ±10%" "CAP: SMD 0805 MD IPC 782" 60.1,27.9 r180 top
C45 "0.1u 50V 0805 ±10%" "CAP: SMD 0805 MD IPC 782" 52.344,30.452 r180 top
C46 "0.1u 50V 0805 ±10%" "CAP: SMD 0805 MD IPC 782" 60.728,32.759 r270 top
C47 "0.1u 50V 0805 ±10%" "CAP: SMD 0805 MD IPC 782" 54.865,40.357 r180 top
C48 "0.01u 50V 0805 ±5%" "CAP: SMD 0805 MD IPC 782" 66.8,63.3 r270 top
C49 "10u 50V 0805 ±10%" "CAP: SMD 0805 MD IPC 782" 77.902,60.561 r90 top
C50 "10u 50V 0805 ±10%" "CAP: SMD 0805 MD IPC 782" 65.8,56.3 r180 top
C51 "0.1u 50V 0805 ±10%" "CAP: SMD 0805 MD IPC 782" 80.447,60.561 r90 top
C52 "0.1u 50V 0805 ±10%" "CAP: SMD 0805 MD IPC 782" 65.8,58.8 r180 top
C53 "0.1u 50V 0603 ±10%" "CAP: SMD 0603 MD IPC 782" 66.7,69.5 r270 top
C54 "0.1u 50V 0603 ±10%" "CAP: SMD 0603 MD IPC 782" 51.1,46.25 r270 top
C55 "0.1u 50V 0603 ±10%" "CAP: SMD 0603 MD IPC 782" 77.3,71.1 r0 top
C56 "0.1u 50V 0603 ±10%" "CAP: SMD 0603 MD IPC 782" 61.9,48.1 r0 top
C57 "0.1u 50V 0603 ±10%" "CAP: SMD 0603 MD IPC 782" 36.342,97.55 r180 top
C58 "0.01u 100V 0603 ±10%" "CAP: SMD 0603 MD IPC 782" 35.6,101.1 r270 top
C59 "0.01u 100V 0603 ±10%" "CAP: SMD 0603 MD IPC 782" 35.4,91.8 r270 top
C60 "1u 16V 0603 ±10%" "CAP: SMD 0603 MD IPC 782" 37.6,101.1 r270 top
C61 "22p 50V 0603 ±5%" "CAP: SMD 0603 MD IPC 782" 41,97.9 r0 top
C62 "22p 50V 0603 ±5%" "CAP: SMD 0603 MD IPC 782" 40.8,91.3 r180 top
C63 "0.1u 50V 0603 ±10%" "CAP: SMD 0603 MD IPC 782" 51.928,53.253 r180 top
C64 "0.1u 50V 0603 ±10%" "CAP: SMD 0603 MD IPC 782" 45.725,59.45 r90 top
C65 "0.1u 50V 0603 ±10%" "CAP: SMD 0603 MD IPC 782" 67.5,76.5 r0 top
C66 "0.22u 50V 0603 ±10% analogue" "CAP: SMD 0603 MD IPC 782" 61.15,111.775 r0 top
C67 "0.1u 50V 0603 ±10%" "CAP: SMD 0603 MD IPC 782" 17.75,85.45 r0 top
C68 "4.7u 25V 0805 ±10%" "CAP: SMD 0805 MD IPC 782" 17.2,91.884 r270 top
C69 "0.1u 50V 0603 ±10%" "CAP: SMD 0603 MD IPC 782" 17.775,79.525 r180 top
C70 "0.1u 50V 0603 ±10%" "CAP: SMD 0603 MD IPC 782" 21.7,99.65 r270 top
C71 "0.1u 50V 0603 ±10%" "CAP: SMD 0603 MD IPC 782" 19.4,92 r90 top
C72 "0.1u 50V 0603 ±10%" "CAP: SMD 0603 MD IPC 782" 31.6,88.05 r90 top
C73 "0.1u 50V 0603 ±10%" "CAP: SMD 0603 MD IPC 782" 29.6,101.675 r180 top
C74 "0.1u 50V 0603 ±10%" "CAP: SMD 0603 MD IPC 782" 37.85,84.45 r90 top
DA1 "AD8028" "IC: SOIC 8" 93.5,52.5 r270 top
DA2 "AD8028" "IC: SOIC 8" 89.9,27.4 r0 top
DA3 "AMS 1117-3.3" "IC: SOT 223" 17,70.5 r90 top
DA4 "AMS 1117-3.3" "IC: SOT 223" 33.45,30.55 r270 top
DA5 "AMS 1117-3.3" "IC: SOT 223" 36.575,60.45 r0 top
DA6 "AM1D-0505SZ" AM1D 46.7,69.8 r0 top
DA7 "TPS65130RGET" "IC: PVQFN 24" 12,17 r180 top
DA8 "IP5306" "IC: SOIC 8 TP" 19.75,48.95 r270 top
DA9 "AD8028" "IC: SOIC 8" 74.2,23.55 r0 top
DA10 "AD8028" "IC: SOIC 8" 74.485,43.064 r90 top
DA11 "OPA189IDBVR" "IC: SOT 23 5pin" 47.978,18.559 r180 top
DA12 "AD620" "IC: SOIC 8" 54.978,24.809 r90 top
DA13 "TLV9101" "IC: SOT 23 5pin" 56.978,32.759 r0 top
DA14 "LF398" "IC: SOIC 14" 72.3,60.595 r180 top
DA15 "ADuM4160" "IC: SOIC 16 WIDE" 28.9,109.2 r180 top
DD1 "ADS1232" TSSOP-24 71.5,71.4 r0 top
DD2 "ADS1232" TSSOP-24 55.928,48.253 r0 top
DD3 "STM32F103RBT6" "MC: LQFP-64" 57.75,98.45 r180 top
DD4 "M24M01-RMN6TP" "IC: SOIC 8" 56.275,115.075 r270 top
L1 "4.7u±20% 2A" "IND: LPS5030" 22.5,13.25 r180 top
L2 "4.7u±20% 2A" "IND: LPS5030" 11.5,28.25 r0 top
L3 "2.2u±20% 2.1A" "IND: LPS3015" 21.25,41.95 r270 top
L4 "BLM18HE601SN1D" "IND: SMD 0603 MD IPC 782" 48.625,60.35 r0 top
L5 "BLM18HE601SN1D" "IND: SMD 0603 MD IPC 782" 16.907,82.209 r90 top
R1 "0 ±1% 0805" "RES: SMD 0805 MD IPC 782" 86.278,66.356 r90 top
R2 "680 ±1% 0603" "RES: SMD 0603 MD IPC 782" 95.1,60.7 r270 top
R3 "680 ±1% 0603" "RES: SMD 0603 MD IPC 782" 92.9,60.8 r270 top
R4 "1k ±1% 0603" "RES: SMD 0603 MD IPC 782" 97.5,60 r270 top
R5 "1k ±1% 0603" "RES: SMD 0603 MD IPC 782" 92,57.9 r0 top
R6 "3k ±1% 0603" "RES: SMD 0603 MD IPC 782" 97.506,56.146 r270 top
R7 "200 ±1% 0603" "RES: SMD 0603 MD IPC 782" 101.5,53 r270 top
R8 "1k ±1% 0805" "RES: SMD 0805 MD IPC 782" 99.233,44.349 r90 top
R9 "2k ±1% 0805" "RES: SMD 0805 MD IPC 782" 93.5,44.228 r0 top
R10 "2k ±1% 0805" "RES: SMD 0805 MD IPC 782" 89.3,49.85 r90 top
R11 "2k ±1% 0805" "RES: SMD 0805 MD IPC 782" 93.5,46.8 r180 top
R12 "1k ±1% 0805" "RES: SMD 0805 MD IPC 782" 93.3,39.964 r180 top
R13 "2k ±1% 0805" "RES: SMD 0805 MD IPC 782" 91.7,34.2 r0 top
R14 "2k ±1% 0805" "RES: SMD 0805 MD IPC 782" 96.4,28 r180 top
R15 "1k ±1% 0805" "RES: SMD 0805 MD IPC 782" 96.661,40.814 r270 top
R16 "1k ±1% 0805" "RES: SMD 0805 MD IPC 782" 39.45,29.15 r180 top
R17 "1k ±1% 0805" "RES: SMD 0805 MD IPC 782" 42.824,30 r270 top
R18 "100R±1%  0805" "RES: SMD 0805 MD IPC 782" 17,20.25 r270 top
R19 "2 ±1% 0603" "RES: SMD 0603 MD IPC 782" 21.634,58.571 r270 top
R20 "121k ±1% 0603" "RES: SMD 0603 MD IPC 782" 5.5,18.25 r180 top
R21 "1.2M ±1% 0603" "RES: SMD 0603 MD IPC 782" 6.5,21.25 r90 top
R22 "10k ±1% 0805" "RES: SMD 0805 MD IPC 782" 4.114,21.45 r270 top
R23 "1.2M ±1% 0603" "RES: SMD 0603 MD IPC 782" 14.187,6.05 r270 top
R24 "133k ±1% 0603" "RES: SMD 0603 MD IPC 782" 12.5,12.25 r180 top
R25 "51k ±1% 0805" "RES: SMD 0805 MD IPC 782" 12.45,9.75 r0 top
R26 "0 ±1% 0805" "RES: SMD 0805 MD IPC 782" 18.09,26.865 r0 top
R27 "0 ±1% 0805" "RES: SMD 0805 MD IPC 782" 23.5,5.75 r0 top
R28 "20R ±1% 0805" "RES: SMD 0805 MD IPC 782" 14.5,46.2 r180 top
R29 "10k ±1% 0805" "RES: SMD 0805 MD IPC 782" 14.5,43.7 r180 top
R30 "0.5 ±1% 0603" "RES: SMD 0603 MD IPC 782" 19.25,38.7 r0 top
R31 "3k ±1% 0805" "RES: SMD 0805 MD IPC 782" 80.65,21.49 r0 top
R32 "3k ±1% 0805" "RES: SMD 0805 MD IPC 782" 67.7,22.65 r180 top
R33 "100R±1%  0805" "RES: SMD 0805 MD IPC 782" 73.8,30.4 r180 top
R34 "1k ±1% 0805" "RES: SMD 0805 MD IPC 782" 68.567,26.022 r270 top
R35 "820k ±1% 0805" "RES: SMD 0805 MD IPC 782" 79.8,24.85 r270 top
R36 "510 ±1% 0805" "RES: SMD 0805 MD IPC 782" 75.238,33.9 r90 top
R37 "510 ±1% 0805" "RES: SMD 0805 MD IPC 782" 72.647,33.9 r90 top
R38 "510 ±1% 0805" "RES: SMD 0805 MD IPC 782" 76.088,37.358 r180 top
R39 "510 ±1% 0805" "RES: SMD 0805 MD IPC 782" 71.797,37.358 r180 top
R40 "300 ±1%  0805" "RES: SMD 0805 MD IPC 782" 79.574,44.255 r0 top
R41 "3k ±1% 0805" "RES: SMD 0805 MD IPC 782" 78.7,47.65 r90 top
R42 "3k ±1% 0805" "RES: SMD 0805 MD IPC 782" 75.1,49.55 r90 top
R43 "3k ±1% 0805" "RES: SMD 0805 MD IPC 782" 75.95,52.95 r180 top
R44 "1M ±1% 0805" "RES: SMD 0805 MD IPC 782" 44.228,18.559 r90 top
R45 "10k ±1% 0805" "RES: SMD 0805 MD IPC 782" 41.728,18.559 r90 top
R46 "510k ±1% 0805" "RES: SMD 0805 MD IPC 782" 52.878,17.943 r0 top
R47 "510k ±1% 0805" "RES: SMD 0805 MD IPC 782" 57.078,17.943 r180 top
R48 "20k ±1% 0805" "RES: SMD 0805 MD IPC 782" 47.375,23.286 r180 top
R49 "51 ±1% 0805" "RES: SMD 0805 MD IPC 782" 50.728,24.559 r90 top
R50 "20k ±1% 0805" "RES: SMD 0805 MD IPC 782" 47.378,25.798 r0 top
R51 "75k ±1% 0805" "RES: SMD 0805 MD IPC 782" 55.715,36.954 r90 top
R54 "27 ±1% 0603" "RES: SMD 0603 MD IPC 782" 19.175,109.275 r180 top
R55 "27 ±1% 0603" "RES: SMD 0603 MD IPC 782" 19.15,112.025 r180 top
R56 "1k ±1% 0603" "RES: SMD 0603 MD IPC 782" 36.327,95.506 r0 top
R57 "10k ±1% 0603" "RES: SMD 0603 MD IPC 782" 29.527,88.05 r270 top
R58 "1k" "RES: SMD 0603 MD IPC 782" 58.003,108.596 r0 top
R59 "1k" "RES: SMD 0603 MD IPC 782" 57.05,106.6 r0 top
R60 "1k" "RES: SMD 0603 MD IPC 782" 54.2,109.7 r0 top
TP1 "Test point" "Test Point" 121.157,19.652 r90 top net-tie
TP2 "Test point" "Test Point" 126.482,19.652 r90 top net-tie
TP3 "Test point" "Test Point" 184.185,19.652 r90 top net-tie
TP4 "Test point" "Test Point" 75,54.9 r90 top net-tie
TP5 "Test point" "Test Point" 61.2,40.1 r90 top net-tie
TP6 "Test point" "Test Point" 178.335,19.652 r90 top net-tie
TP7 "Test point" "Test Point" 139.458,19.652 r90 top net-tie
TP8 "Test point" "Test Point" 152.409,19.652 r90 top net-tie
TP9 "Test point" "Test Point" 165.384,19.652 r90 top net-tie
TP10 "Test point" "Test Point" 171.235,19.652 r90 top net-tie
TP11 "Test point" "Test Point" 79.9,15.15 r90 top net-tie
TP12 "Test point" "Test Point" 158.259,19.652 r90 top net-tie
TP13 "Test point" "Test Point" 75.5,13.9 r90 top net-tie
TP14 "Test point" "Test Point" 145.308,19.652 r90 top net-tie
TP15 "Test point" "Test Point" 88.9,18.9 r90 top net-tie
TP16 "Test point" "Test Point" 132.333,19.652 r90 top net-tie
TP17 "Test point" "Test Point" 84.3,18.5 r90 top net-tie
TP18 "Test point" "Test Point" 49.728,7.559 r90 top net-tie
TP19 "Test point" "Test Point" 114.032,19.652 r90 top net-tie
TP20 "Test point" "Test Point" 52.478,7.559 r90 top net-tie
TP21 "Test point" "Test Point" 55.101,7.559 r90 top net-tie
TP22 "Test point" "Test Point" 106.656,19.652 r90 top net-tie
TP23 "Test point" "Test Point" 106.656,1.951 r90 top net-tie
TP24 "Test point" "Test Point" 114.032,1.951 r90 top net-tie
TP25 "Test point" "Test Point" 96.661,45.281 r90 top net-tie
TP26 "Test point" "Test Point" 53.978,19.809 r90 top net-tie
TP27 "Test point" "Test Point" 55.978,19.809 r90 top net-tie
TP28 "Test point" "Test Point" 55.671,29.928 r90 top net-tie
TP29 "Test point" "Test Point" 55.802,42.401 r90 top net-tie
TP30 "Test point" "Test Point" 159.384,14.802 r90 top net-tie
TP31 "Test point" "Test Point" 152.009,14.802 r90 top net-tie
VD1 "VS-10BQ040-M35BT 1A 40V" "DIODE: SMB" 18.5,10.75 r270 top
VD2 "KPT-1608SGC" "DIODE: LED 0603(1608) green" 8.75,52.95 r90 top
VD3 "KPT-1608SGC" "DIODE: LED 0603(1608) green" 11,52.95 r270 top
VD4 "KPT-1608SGC" "DIODE: LED 0603(1608) green" 13.25,52.95 r90 top
VD5 "VS-10BQ040-M35BT 1A 40V" "DIODE: SMB" 12.5,24.25 r180 top
VD6 "KPT-1608SGC" "DIODE: LED 0603(1608) green" 15.5,52.95 r270 top
VD7 "KP-1608SURCK" "DIODE: LED 0603(1608) red" 10.494,46.311 r0 top
VT1 "Si2302CDS-T1-E3" "IC: SOT 23" 27.5,21.25 r0 top
X1 "WF-3" "CON: 3pin wf-3" 52.478,3.559 r180 bottom
X2 "Micro-Fit 3.0 43045-0401" "CON: 4pin Molex MicroFit 3.0 43045-0401" 81.5,6 r180 bottom
X3 "MicroFit 3.0 43650-0225" "CON: 2pin Molex MicroFit 3.0 43650-0225" 3.364,34.455 r90 bottom
X4 "Micro-USB" "CON: 5pin USB Micro" 3.5,59.7 r90 bottom
X5 "WF-2" "CON: 2pin wf-2" 3.75,45.5 r270 bottom
X6 "BH20" "CON: BH-20" 81,98 r90 bottom
X7 "USB-A" "CON: 4PIN USB B" 11.175,110.4 r90 bottom
ZQ1 "KT-7T 8MHz" "CRYSTAL: 3225 4pin" 40.9,94.6 r270 top

## Footprints (in the part's own frame and the unit in brackets; to place one, negate y for a bottom-side part, rotate by r counter-clockwise, add the part's x,y. Pads: shape width x height; smd on the part's side, far side on the other; paste and mask are expansions set on the pad)
AM1D [mil]
  rrect50% 60x60 / inner round 60 / far side rrect50% 60x60 hole 38 paste-99999 mask+0: 1(-300,70)
  round 60 hole 38 paste-99999 mask+0: 2(-200,70) 5(100,70) 7(300,70)
  silkscreen extent -389,-122 389,124, body extent -384,-118 384,118, height 394
"CAP: SMD 0603 MD IPC 782" [mm]
  rrect50% 1.1x1 smd: 1(-0.85,0) 2(0.85,0)
  silkscreen extent 0,-0.5 0,0.5, body extent -1.23,-0.4 1.23,0.4, height 0.8
"CAP: SMD 0805 MD IPC 782" [mm]
  rrect50% 1.3x1.5 smd: 1(-0.95,0) 2(0.95,0)
  silkscreen extent 0,-0.8 0,0.8, body extent -1.4,-0.63 1.4,0.63, height 0.8
"CON: 2pin Molex MicroFit 3.0 43650-0225" [mm] "Vertical, Single Row"
  rect 3.43x1.45 smd: 0(-5.375,0) 0(5.375,0)
  rect 1.27x2.54 smd: 1(-1.5,3.2) 2(1.5,3.2)
  silkscreen extent -8,-2.7 7.4,5.4, body extent -6.83,-2.47 6.83,4.1, height 9.95
"CON: 2pin wf-2" [mm]
  round 1.8 hole 1: 1(-1.3,0.5) 2(1.3,0.5)
  silkscreen extent -2.7,-3 2.8,3.2, body extent -2.49,-2.8 2.59,3, height 11.56
"CON: 3pin wf-3" [mm]
  round 1.8 hole 1: 1(-2.6,0.4) 2(0,0.4) 3(2.6,0.4)
  silkscreen extent -4,-3.1 4.1,3.1, body extent -3.81,-2.9 3.81,2.9, height 11.56
"CON: 4pin Molex MicroFit 3.0 43045-0401" [mm]
  round 1.3 hole 3: 0(0,-0.3)
  round 1.8 hole 1: 1(1.5,4) 2(-1.5,4) 3(1.5,7) 4(-1.5,7)
  silkscreen extent -5.4,-5.9 5.9,8.2, body extent -5.07,-4.95 5.07,7.29, height 8.83
"CON: 4PIN USB B" [mm]
  rrect50% 1.508x1.508 / inner round 1.508 / far side rrect50% 1.508x1.508 hole 1: 1(-3.5,2.71)
  round 1.508 hole 1: 2(-1,2.71) 3(1,2.71) 4(3.5,2.71)
  round 2.38 hole 2.38 unplated: ""(-6.57,0) ""(6.57,0)
  silkscreen extent -8.61,-10.3 7.25,3.8, body extent -7.9,-10.3 7.9,3.8, height 7.6
"CON: 5pin USB Micro" [mm]
  rrect100% 1x1.65 hole 0.6 slot 1.15 at 90 deg: 0(-3.5,0) 0(3.5,0)
  rrect100% 1.35x1.05 hole 0.6 slot 0.85 at 0 deg: 0(-2.5,2.7) 0(2.5,2.7)
  rrect50% 1.5x1.55 smd: 0(-1,0) 0(1,0)
  rrect50% 0.4x1.35 smd mask+0.07: 1(-1.3,2.7) 2(-0.65,2.7) 3(0,2.7) 4(0.65,2.7) 5(1.3,2.7)
  Top Layer region: 3.5,-0.825 2.3,-0.825 2.3,0.825 3.5,0.825
  Top Layer region: -3.5,-0.825 -2.3,-0.825 -2.3,0.825 -3.5,0.825
  Bottom Layer region: 3.5,-0.775 3.723,-0.715 3.885,-0.552 3.945,-0.33 3.945,-0.33 3.945,0.33 3.911,0.5 3.815,0.645 3.67,0.741 3.5,0.775 3.5,0.775 3.33,0.741 3.185,0.645 3.089,0.5 3.055,0.33 3.055,0.33 3.055,-0.33 3.089,-0.5 3.185,-0.645 3.33,-0.741 3.5,-0.775
  Bottom Layer region: -3.5,-0.775 -3.277,-0.715 -3.115,-0.552 -3.055,-0.33 -3.055,-0.33 -3.055,0.33 -3.089,0.5 -3.185,0.645 -3.33,0.741 -3.5,0.775 -3.5,0.775 -3.67,0.741 -3.815,0.645 -3.911,0.5 -3.945,0.33 -3.945,0.33 -3.945,-0.33 -3.911,-0.5 -3.815,-0.645 -3.67,-0.741 -3.5,-0.775
  silkscreen extent -4.83,-1.3 4.2,4.27, body extent -4.03,-2.7 4.02,2.88, height 2.71
"CON: BH-20" [mm]
  round 2 hole 1.2: 1(-11.3,-1.3) 2(-11.3,1.2) 3(-8.8,-1.3) 4(-8.8,1.2) 5(-6.3,-1.3) 6(-6.3,1.2) 7(-3.8,-1.3) 8(-3.8,1.2) 9(-1.3,-1.3) 10(-1.3,1.2) 11(1.2,-1.3) 12(1.2,1.2) 13(3.7,-1.3) 14(3.7,1.2) 15(6.2,-1.3) 16(6.2,1.2) 17(8.7,-1.3) 18(8.7,1.2) 19(11.2,-1.3) 20(11.2,1.2)
  silkscreen extent -17.1,-5.1 16.6,4.83, body extent -16.51,-4.38 16.51,4.72, height 8.75
"CRYSTAL: 3225 4pin" [mm]
  rrect50% 1.4x1.2 smd: 1(-1.05,-0.8) 2(-1.05,0.8) 3(1.05,0.8) 4(1.05,-0.8)
  silkscreen extent -2.5,-2 2.1,1.7, body extent -1.6,-1.2 1.6,1.3, height 0.61
"CRYSTAL: HC-49SM" [mm]
  rrect50% 5.5x2 smd: 1(-4.5,0) 2(4.5,0)
  silkscreen extent -7.6,-2.6 7.6,2.6, body extent -6.2,-2.35 6.2,2.35, height 3.8
"DIODE: LED 0603(1608) green" [mm]
  rrect50% 0.8x0.8 smd: 1(-0.825,0) 2(0.825,0)
  silkscreen extent -1.63,-0.5 0,0.83, body extent -0.82,-0.4 0.78,0.4, height 0.6
"DIODE: LED 0603(1608) red" [mm]
  rrect50% 0.8x0.8 smd: 1(-0.825,0) 2(0.825,0)
  silkscreen extent -1.63,-0.5 0,0.83, body extent -0.82,-0.4 0.78,0.4, height 0.6
"DIODE: SMB" [mm]
  rrect50% 2x2.5 smd: 1(2,0) 2(-2,0)
  silkscreen extent 0,-1.5 3.6,1.9, body extent -2.7,-1.8 2.7,1.8, height 2.3
"IC: PVQFN 24" [mm]
  round 0.4 hole 0.2 mask+0.102: 0(-0.75,0.75) 0(-0.75,0) 0(-0.75,-0.75) 0(0,0.75) 0(0,0) 0(0,-0.75) 0(0.75,0.75) 0(0.75,0) 0(0.75,-0.75)
  rrect50% 2.45x2.45 smd: 0(0,0)
  rrect50% 0.85x0.3 smd mask+0.05: 1(-2,1.25) 2(-2,0.75) 3(-2,0.25) 4(-2,-0.25) 5(-2,-0.75) 6(-2,-1.25) 13(2,-1.25) 14(2,-0.75) 15(2,-0.25) 16(2,0.25) 17(2,0.75) 18(2,1.25)
  rrect50% 0.3x0.85 smd mask+0.05: 7(-1.25,-2) 8(-0.75,-2) 9(-0.25,-2) 10(0.25,-2) 11(0.75,-2) 12(1.25,-2) 19(1.25,2) 20(0.75,2) 21(0.25,2) 22(-0.25,2) 23(-0.75,2) 24(-1.25,2)
  silkscreen extent -1.81,-1.25 1.25,1.81, body extent -2,-2 2,2, height 0.75
"IC: SOIC 8" [mm]
  rrect50% 2.25x0.6 smd: 1(-2.6,1.905) 2(-2.6,0.635) 3(-2.6,-0.635) 4(-2.6,-1.905) 5(2.6,-1.905) 6(2.6,-0.635) 7(2.6,0.635) 8(2.6,1.905)
  silkscreen extent -4.1,-2.4 1.2,2.7, body extent -3.05,-2.45 2.95,2.45, height 1.75
"IC: SOIC 8 TP" [mm]
  rrect50% 2.5x3 smd paste+0: 0(0,0)
  round 0.4 hole 0.2 mask+0.102: 0(0,0)
  rrect50% 1.7x0.6 smd: 1(-2.88,1.905) 2(-2.88,0.635) 3(-2.88,-0.635) 4(-2.88,-1.905) 5(2.88,-1.905) 6(2.88,-0.635) 7(2.88,0.635) 8(2.88,1.905)
  silkscreen extent -4.1,-2.4 1.6,2.7, body extent -3.05,-2.45 2.95,2.45, height 1.75
"IC: SOIC 14" [mm]
  rrect50% 2.2x0.6 smd: 1(-2.6,3.845) 2(-2.6,2.575) 3(-2.6,1.305) 4(-2.6,0.035) 5(-2.6,-1.235) 6(-2.6,-2.505) 7(-2.6,-3.775) 8(2.6,-3.775) 9(2.6,-2.505) 10(2.6,-1.235) 11(2.6,0.035) 12(2.6,1.305) 13(2.6,2.575) 14(2.6,3.845)
  silkscreen extent -4.03,-4.4 1.25,4.7, body extent -3,-4.37 3,4.32, height 1.6
"IC: SOIC 16 WIDE" [mm]
  rect 2.2x0.6 smd: 1(-4.68,5.26) 2(-4.68,3.99) 3(-4.68,2.72) 4(-4.68,1.45) 5(-4.68,0.18) 6(-4.68,-1.09) 7(-4.68,-2.36) 8(-4.68,-3.63) 9(4.52,-3.63) 10(4.52,-2.36) 11(4.52,-1.09) 12(4.52,0.18) 13(4.52,1.45) 14(4.52,2.72) 15(4.52,3.99) 16(4.52,5.26)
  silkscreen extent -6.13,-4 3.12,6.11, body extent -5.26,-4.35 5.06,5.95, height 2.65
"IC: SOT 23" [mm]
  rrect50% 1.4x1 smd: 1(-1.1,0.95) 2(-1.1,-0.95) 3(1.1,0)
  silkscreen extent -2.1,-1.8 2.1,1.8, body extent -1.32,-1.5 1.32,1.5, height 1.08
"IC: SOT 23 5pin" [mm]
  rrect50% 1.1x0.6 smd: 1(-1.3,0.95) 2(-1.3,0) 3(-1.3,-0.95) 4(1.3,-0.95) 5(1.3,0.95)
  silkscreen extent -2.2,-1.5 0.46,1.8, body extent -1.5,-1.5 1.5,1.5, height 1.3
"IC: SOT 223" [mm]
  rrect50% 2.2x1.2 smd: 1(-3.1,2.3) 2(-3.1,0) 3(-3.1,-2.3)
  rrect50% 2.2x3.5 smd: 4(3.1,0)
  silkscreen extent -1.3,-3.35 1.3,3.35, body extent -3.48,-3.25 3.48,3.25, height 1.9
"IND: LPS3015" [mm]
  rrect50% 0.63x3.3 smd mask+0: 1(-1.23,0) 2(1.225,0)
  Top Layer region: -1.545,1 -0.39,1 -0.39,1.65 -1.545,1.65
  Top Layer region: 1.54,1 0.385,1 0.385,1.65 1.54,1.65
  Top Layer region: 1.54,-1 0.385,-1 0.385,-1.65 1.54,-1.65
  Top Layer region: -1.545,-1 -0.39,-1 -0.39,-1.65 -1.545,-1.65
  Top Layer pour cut-out: -0.39,1.65 0.385,1.65 0.385,1 0.91,1 0.91,-1 0.385,-1 0.385,-1.65 -0.39,-1.65 -0.39,-1 -0.915,-1 -0.915,1 -0.39,1
  silkscreen extent -2.2,-1.88 1.78,1.88, body extent -1.52,-1.52 1.52,1.52, height 1.5
"IND: LPS5030" [mil]
  rrect50% 30x30 smd paste+0 mask+0: 1(-45,0) 2(45,0)
  Top Layer region: -10,-60 -40,-60 -60,-40 -60,40 -40,60 -10,60 -10,30 -30,10 -30,-10 -10,-30
  Top Layer region: 10,-60 40,-60 60,-40 60,40 40,60 10,60 10,30 30,10 30,-10 10,-30
  Top Layer pour cut-out: -10,60 -10,30 -30,10 -30,-10 -10,-30 -10,-60 10,-60 10,-30 30,-10 30,10 10,30 10,60
  silkscreen extent -86,-70 70,70, body extent -60,-60 60,60, height 59
"IND: SMD 0603 MD IPC 782" [mm]
  rrect50% 1.1x1 smd: 1(-0.85,0) 2(0.85,0)
  silkscreen extent 0,-0.75 0,0.75, body extent -0.8,-0.4 0.8,0.4, height 0.8
"MC: LQFP-64" [mm]
  rrect50% 1.2x0.3 smd mask+0.05: 1(-5.8,3.75) 2(-5.8,3.25) 3(-5.8,2.75) 4(-5.8,2.25) 5(-5.8,1.75) 6(-5.8,1.25) 7(-5.8,0.75) 8(-5.8,0.25) 9(-5.8,-0.25) 10(-5.8,-0.75) 11(-5.8,-1.25) 12(-5.8,-1.75) 13(-5.8,-2.25) 14(-5.8,-2.75) 15(-5.8,-3.25) 16(-5.8,-3.75) 33(5.825,-3.75) 34(5.825,-3.25) 35(5.825,-2.75) 36(5.825,-2.25) 37(5.825,-1.75) 38(5.825,-1.25) 39(5.825,-0.75) 40(5.825,-0.25) 41(5.825,0.25) 42(5.825,0.75) 43(5.825,1.25) 44(5.825,1.75) 45(5.825,2.25) 46(5.825,2.75) 47(5.825,3.25) 48(5.825,3.75)
  rrect50% 0.3x1.2 smd mask+0.05: 17(-3.75,-5.8) 18(-3.25,-5.8) 19(-2.75,-5.8) 20(-2.25,-5.8) 21(-1.75,-5.8) 22(-1.25,-5.8) 23(-0.75,-5.8) 24(-0.25,-5.8) 25(0.25,-5.8) 26(0.75,-5.8) 27(1.25,-5.8) 28(1.75,-5.8) 29(2.25,-5.8) 30(2.75,-5.8) 31(3.25,-5.8) 32(3.75,-5.8) 49(3.75,5.825) 50(3.25,5.825) 51(2.75,5.825) 52(2.25,5.825) 53(1.75,5.825) 54(1.25,5.825) 55(0.75,5.825) 56(0.25,5.825) 57(-0.25,5.825) 58(-0.75,5.825) 59(-1.25,5.825) 60(-1.75,5.825) 61(-2.25,5.825) 62(-2.75,5.825) 63(-3.25,5.825) 64(-3.75,5.825)
  silkscreen extent -5.85,-4.95 4.97,5.67, body extent -6,-6 6,6, height 1.6
"RES: SMD 0603 MD IPC 782" [mm]
  rrect50% 1.1x1 smd: 1(-0.85,0) 2(0.85,0)
  silkscreen extent 0,-0.75 0,0.75, body extent -1.23,-0.4 1.23,0.4, height 0.8
"RES: SMD 0805 MD IPC 782" [mm]
  rrect50% 1.3x1.5 smd: 1(-0.95,0) 2(0.95,0)
  silkscreen extent 0,-1 0,1, body extent -1.4,-0.62 1.4,0.63, height 0.8
"Slide Switch 3 pin" [mm]
  round 1 hole 1 unplated mask+0.35: 0(-1.469,1.356) 0(1.486,1.326)
  rrect50% 1x0.8 smd: 1(-3.5,0.25) 1(-3.5,2.5) 1(3.5,0.25) 1(3.5,2.5)
  rrect50% 1x1.5 smd: 1(-2.25,3.25) 2(0.75,3.25) 3(2.25,3.25)
  silkscreen extent -3.75,-1.5 3.75,3.5, body extent -3.85,-1.5 3.85,3.59, height 1.4
"Test Point" [mm]
  round 0.7 smd: 1(0,0)
TSSOP-24 [mil]
  rrect50% 58x14 smd: 1(-115,141) 2(-115,115) 3(-115,90) 4(-115,64) 5(-115,38) 6(-115,13) 7(-115,-13) 8(-115,-38) 9(-115,-64) 10(-115,-90) 11(-115,-115) 12(-115,-141) 13(115,-141) 14(115,-115) 15(115,-90) 16(115,-64) 17(115,-38) 18(115,-13) 19(115,13) 20(115,38) 21(115,64) 22(115,90) 23(115,115) 24(115,141)
  silkscreen extent -76,-156 76,156, body extent -126,-154 126,154, height 43